# EAGLE board numbers (EAGLE 5.10)

Size 91 x 141 mm. Coordinates in mm from the lower left corner, seen from the top.
Outline: 91,0 0,0 0,141 91,141 91,0
Copper layers (1*16): Top 0.035mm / dielectric 1.5mm / Bottom 0.035mm
Design rules "default": minimum track width 10mil, minimum drill 24mil, track to track 8mil, track to pad 8mil, pad to pad 8mil, via to via 8mil, smd to smd 8mil, copper to edge 40mil, drill to drill 8mil, minimum pad ring 10mil, minimum via ring 8mil, stop-mask expansion 4mil, vias tented up to drill 0mil, thermal gap 10mil

## Footprints (pad centres in the part's own frame; a part is rotated, then mirrored left to right if it is on the bottom)
SO14 = smd 0.6 x 2.2: 1 -3.81,-2.6; 2 -2.54,-2.6; 3 -1.27,-2.6; 4 0,-2.6; 5 1.27,-2.6; 6 2.54,-2.6; 7 3.81,-2.6; 8 3.81,2.6; 9 2.54,2.6; 10 1.27,2.6; 11 0,2.6; 12 -1.27,2.6; 13 -2.54,2.6; 14 -3.81,2.6
SA56-11 = drill 0.8 long: 1 -5.08,-7.62; 2 -2.54,-7.62; 3 0,-7.62; 4 2.54,-7.62; 5 5.08,-7.62; 6 5.08,7.62; 7 2.54,7.62; 8 0,7.62; 9 -2.54,7.62; 10 -5.08,7.62

## Placement (x,y rotation side)
E$31  [SO14]  82.32,55.11 180 top
E$32  [SO14]  82.32,24.5 180 top
E$34  [SA56-11]  25.93,55.17 0 top
E$35  [SA56-11]  39.39,55.17 0 top
E$36  [SA56-11]  52.85,55.17 0 top
E$37  [SA56-11]  66.31,55.17 0 top
E$38  [SO14]  82.32,85.71 180 top
E$40  [SA56-11]  25.93,85.78 0 top
E$41  [SA56-11]  39.39,85.78 0 top
E$42  [SA56-11]  52.85,85.78 0 top
E$43  [SA56-11]  66.31,85.78 0 top
E$44  [SO14]  82.32,116.32 180 top
E$46  [SA56-11]  25.93,116.38 0 top
E$48  [SA56-11]  25.93,24.56 0 top
E$49  [SA56-11]  39.39,24.56 0 top
E$50  [SA56-11]  52.85,24.56 0 top
E$51  [SA56-11]  66.31,24.56 0 top
E$52  [SA56-11]  39.39,116.38 0 top
E$53  [SA56-11]  52.85,116.38 0 top
E$54  [SA56-11]  66.31,116.38 0 top

## Library data of the parts
E$31 E$32 E$38 E$44 = analog-devices
E$34-E$37 E$40-E$43 E$46 E$48-E$54 = display-kingbright

## Tracks (layer width: path | path; a pad name or v marks a point on that pad's centre or on a via)
(copper drawn outside any net)
  shapes: Top area x1752

## Text on the board
Unrouted: gnd | Q3 | Q2 | Q1 | Q0 | B | A | cp | MR | Q4 | Q5 | Q6 | Q7 | Vcc | gnd | Q3 | Q2 | Q1 | Q0 | B | A | cp | MR | Q4 | Q5 | Q6 | Q7 | Vcc | gnd | Q3 | Q2 | Q1 | Q0 | B | A | MR | Vcc | cp | Q4 | Q5 | Q6 | Q7 | gnd | Q3 | Q2 | Q1 | Q0 | B | A | cp | MR | Q4 | Q5 | Q6 | Q7 | Vcc